# Altium PCB PCB1.PcbDoc
Units mm, origin at the board's own origin, x right, y up, seen from the top; angles counter-clockwise.
Board outline 244.98 x 101.98 mm, 2 copper layers (Top Layer, Bottom Layer), stack 2.391 mm thick; 16 components, 11 nets, 42 pads, 9 vias.
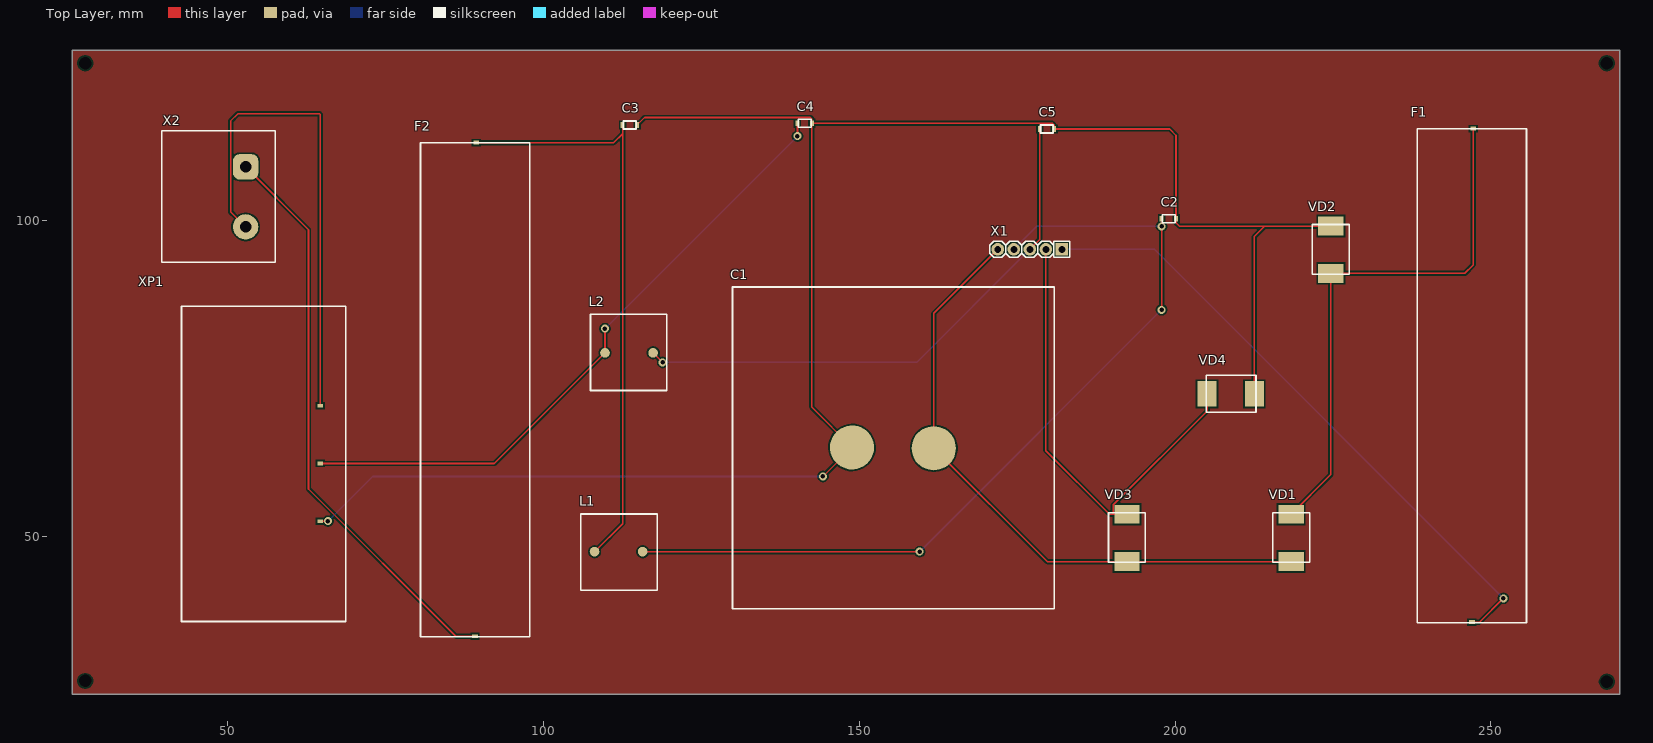
[diagram p0: Top Layer view]
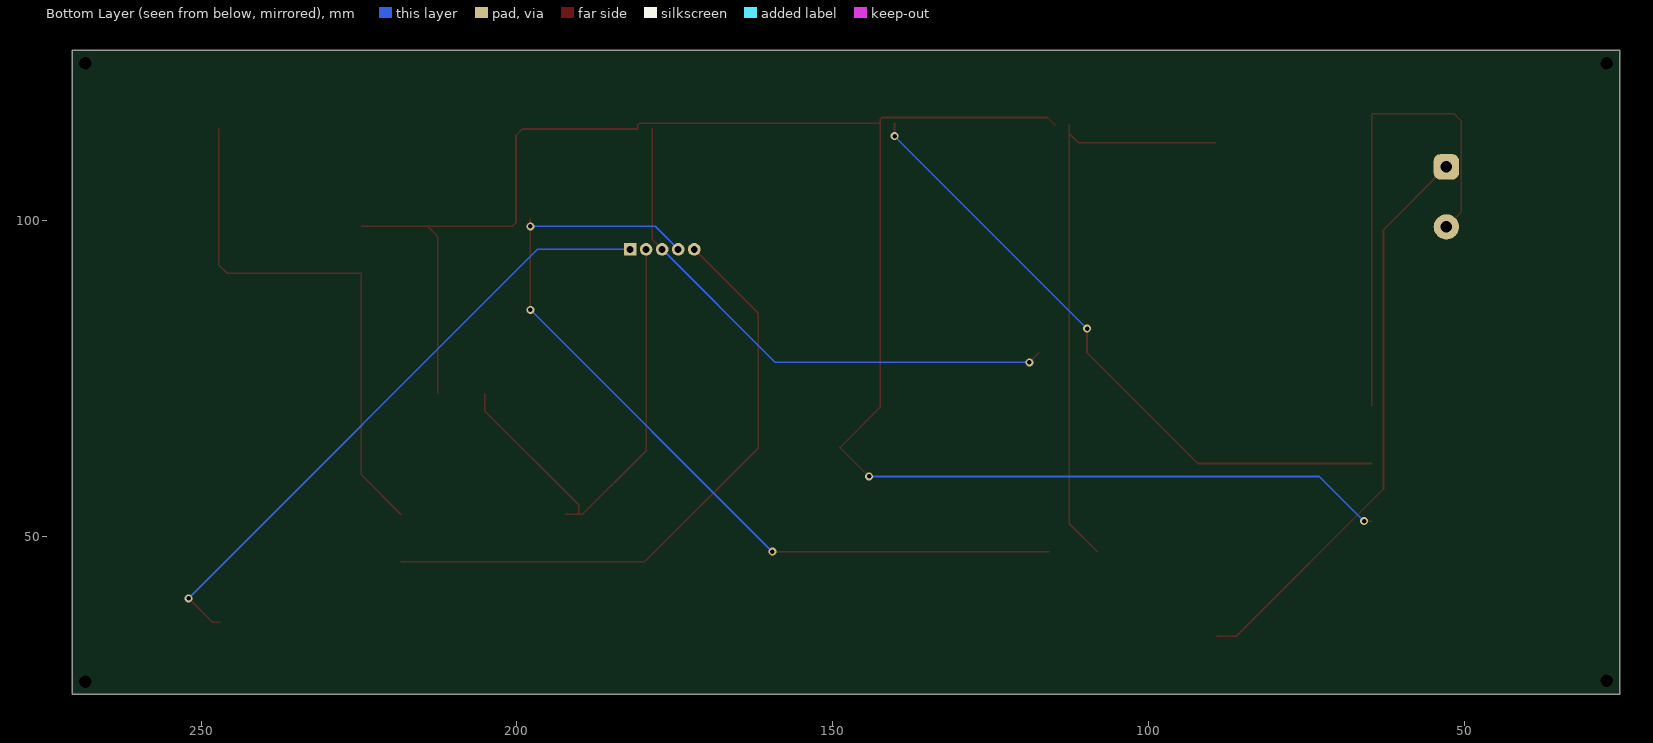
[diagram p1: Bottom Layer view, seen from below]
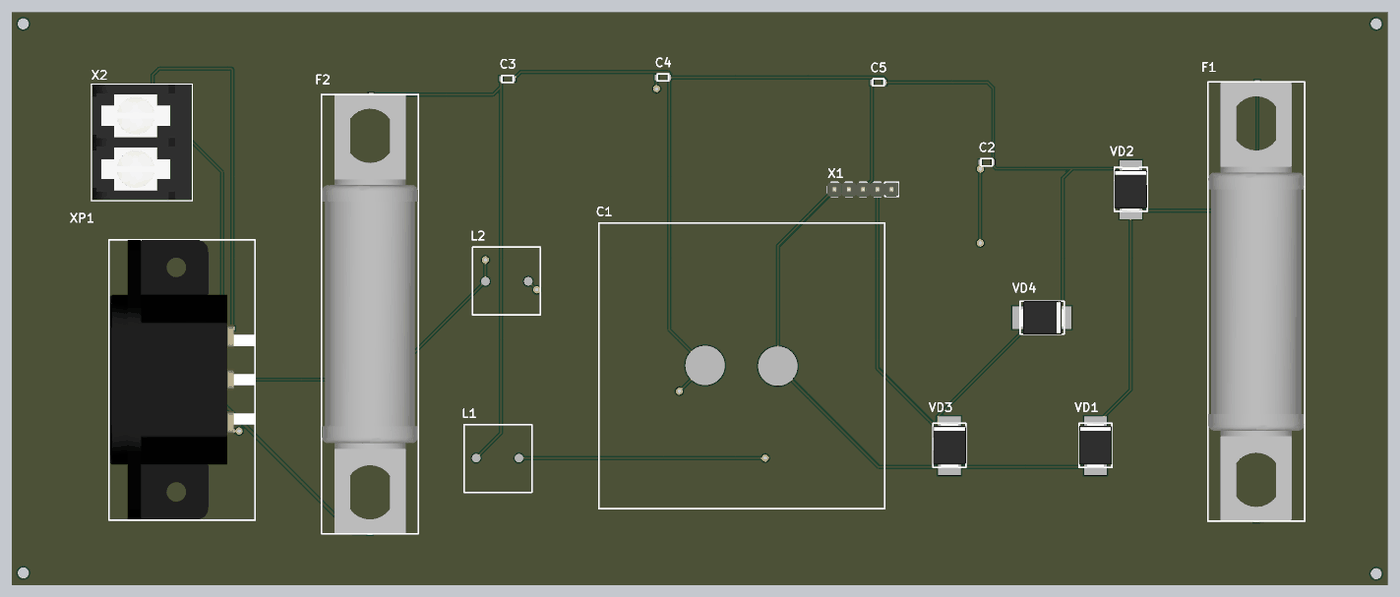
[diagram p2: 3D render of the assembled board from above, using the file's embedded part models]

## Layer stack, top to bottom
Top Solder: solder mask 0.0102, Solder Resist, Dk 3.5
Top Layer: signal copper 0.0356
Dielectric 1: dielectric 2.32, FR-4, Dk 4.8
Bottom Layer: signal copper 0.0356
Bottom Solder: solder mask 0.0102, Solder Resist, Dk 3.5

## Board outline
25.4,25.019 270.383,25.019 270.383,127 25.4,127

## Design rules (kind name [scope] priority, off if disabled: settings)
Clearance [All] p1: gap=0.254 ignorepadtopadclearanceinfootprint=FALSE
PolygonConnect [All] p1: connectstyle=Relief reliefconductorwidth=0.254 reliefentries=4 polygonreliefangle="90 Angle" airgapwidth=0.254
RoutingVias [All] p1: holewidth=0.711 width=1.27 viastyle="Through Hole" minholewidth=0.711 minwidth=1.27 maxholewidth=0.711 maxwidth=1.27
SolderMaskExpansion [All] p1: expansion=0.102 istentingtop=FALSE
SupplyNets "Schematic Supply Nets" [InNet('NetC1_1')] p1: voltage=0.000
Width [All] p1: maxlimit=0.254 minlimit=0.254 preferedwidth=0.254
30 further rules are at their usual default settings.

## Components (designator, comment, footprint, x,y, rotation, side; value= is the part's Value field where it differs from the comment)
C1 "22000 мкФ-63В-10%" condpolar 156.845,65.151 r0 top
C2 "0.1 мкФ-10%-25В-0805" Condensator 199.009,100.33 r180 top
C3 "0.1 мкФ-10%-25В-0805" Condensator 113.665,115.189 r180 top
C4 "0.1 мкФ-10%-25В-0805" Condensator 141.351,115.443 r0 top
C5 "0.1 мкФ-10%-25В-0805" Condensator 179.705,114.554 r180 top
F1 "80А-690В(80FE)" "FUSE 80" 247,75.5 r0 top
F2 "80А-690В(80FE)" "FUSE 80" 89.154,73.279 r0 top
L1 "10мГн-0.22A-10%" inductor 112.014,47.498 r180 top
L2 "10мГн-0.22A-10%" inductor 113.411,79.248 r0 top
VD1 "SMCJ150A-E3/57T" DIOD 218.5,50 r0 top
VD2 "SMCJ150A-E3/57T" DIOD 224.79,95.631 r0 top
VD3 "SMCJ150A-E3/57T" DIOD 192.5,50 r0 top
VD4 "SMCJ150A-E3/57T" DIOD 209,72.5 r270 top
X1 "Connector, 5pin, 2.54mm, 500VAC, 3A" "CON: PLS-5" 177,95.5 r180 top
X2 "Connector, 2pin, 9.53mm, 300VAC, 25A" "CON: 6PCV-02-006" 52.832,108.56 r270 top
XP1 "Connector, 3pin, 2.54mm, 250VAC, 3A" AC 51.816,59.182 r90 top

## Footprints (in the part's own frame and the unit in brackets; to place one, negate y for a bottom-side part, rotate by r counter-clockwise, add the part's x,y. Pads: shape width x height; smd on the part's side, far side on the other; paste and mask are expansions set on the pad)
AC [mm]
  rect 0.6x0.9 smd: 1(11.557,-12.827) 2(-6.731,-12.827) 3(2.413,-12.827)
  silkscreen extent -22.61,-16.89 27.3,9.14, body extent -22.49,-16.76 27.31,9.04, height 31.37
"CON: 6PCV-02-006" [mm]
  rrect50% 4x4 hole 1.8: 1(0,0)
  round 4 hole 1.8: 2(9.5,0)
  round 0.5 on Mech1: ""(-5,4)
  round 0.5 on Top Overlay: ""(-5,4)
  silkscreen extent -5.7,-13.3 15.1,4.7, body extent -5.6,-13.2 15,4.58, height 15.96
"CON: PLS-5" [mm]
  rect 2x2 hole 1.1: 1(-5.08,0)
  round 2 hole 1.1: 2(-2.54,0) 3(0,0) 4(2.54,0) 5(5.08,0)
  silkscreen extent -6.35,-1.27 6.35,1.27, body extent -6.35,-1.27 6.35,1.27, height 8.54
Condensator [mm]
  rect 0.6x0.9 smd: 1(-1.143,0) 2(1.143,0)
  silkscreen extent -1.02,-0.64 1.02,0.64, body extent -0.98,-0.65 1.02,0.65, height 1.27
condpolar [mm]
  round 7 smd: 1(-8.001,-1.016) 2(4.953,-1.143)
  silkscreen extent -26.92,-26.54 24,24.38, body extent -27.02,-26.59 23.98,24.31, height 102
DIOD [mm]
  rect 4x3 smd: 1(-0.127,3.556) 2(-0.127,-3.937)
  silkscreen extent -3.05,-4.06 2.79,3.81, body extent -3.08,-4.06 2.83,3.88, height 2.79
"FUSE 80" [mm]
  rect 0.9x0.6 smd: 1(0,-39.027) 2(0.2,39.127)
  silkscreen extent -8.64,-39.12 8.64,39.12, body extent -8.55,-39 8.55,39, height 19.11
inductor [mil]
  round 60 smd: 1(-145,-5) 2(155,-5)
  silkscreen extent -235,-240 240,235, body extent -231,-241 241,231, height 1003

## Part data
C1: library part конденсатор_поляр, Manufacturer=Тайвань, PartNumber=ECAP22000uF/63V,85°C, Href=https://www.chipdip.ru/product0/52234, Kind="Конденсатор полярный"
C2 C3 C4 C5: library part конденсатор, Manufacturer="Murata Electronics", PartNumber=GRM21BR71E104KA01L, Href=https://www.chipdip.ru/product/grm21br71e104ka01l, Kind=конденсатор
F1 F2: library part FUSE, Manufacturer=Eaton, PartNumber=80FE, Href=https://www.chipdip.ru/product0/8007032559, Kind=Дроссель
L1: library part inductor, Manufacturer="Kemet Electronics", PartNumber=SBC6-103-161, Href=https://www.chipdip.ru/product0/8008421775, Kind=Дроссель
L2: library part inductor, Manufacturer="Kemet Electronics", Href=https://www.chipdip.ru/product0/8008421775, Kind=Дроссель, PurtNumber=SBC6-103-161
VD1 VD2 VD3 VD4: library part Diod, Manufacturer="VISHAY INTERTECHNOLOGY INC.", Href=https://www.chipdip.ru/product0/8612399438
  VD1 VD4: Kind=Диод, PartNumber=SMCJ150A-E3/57T
  VD2: Kind=диод, PartNumber=SMCJ150A-E3/57T
  VD3: Kind=Диод, PurtNumber=SMCJ150A-E3/57T
X1: library part PLS-5, CurrentMax=3A, Manufacturer=Connfly, VoltageMax=500VAC, CommentText=DS1021-1x5, HelpURL=https://www.chipdip.ru/product/pls-5, Multichannel=5pin, PartNumber=PLS-5, Pitch=2.54mm, TypeConnector=Connector, ValueManufacturerPartNumber="Connector, 5pin, 2.54mm, 500VAC, 3A"
X2: library part Connector_6PCV-02, CurrentMax=25A, Manufacturer="TE Connectivity", PartNumber=6PCV-02-006, VoltageMax=300VAC, CommentText=6PCV-02-006, HelpURL=https://www.digikey.com/products/en?keywords=6PCV-02-006, Multichannel=2pin, Pitch=9.53mm, TypeConnector=Connector, ValueManufacturerPartNumber="Connector, 2pin, 9.53mm, 300VAC, 25A"
XP1: library part WF-3, CurrentMax=3A, Manufacturer=Connfly, VoltageMax=250VAC, CommentText=AS-205-UL-EN, HelpURL=https://www.chipdip.ru/product/wf-3, Multichannel=3pin, PartNumber=WF-3, Pitch=2.54mm, TypeConnector=Connector, ValueManufacturerPartNumber="Connector, 3pin, 2.54mm, 250VAC, 3A"

## Free pads (board coordinates)
  round 0 hole 2 unplated: 8(27.416,27.162) 8(27.416,124.984) 8(268.367,124.984) 8(268.375,27.025)

## Via types
v1: diameter 1.27, hole 0.711, Top Layer to Bottom Layer, 9 vias

## Nets (pads, with @x,y where several pads share a name; then routed paths per layer and width w, separated by ;. In a path a pad name is that pad's centre, name@x,y a point inside that pad or via, vN(x,y) a via of type N, cw(c..) or ccw(c..) an arc to the next point about the centre after c; other vN are vias at no path point)
NetC1_1: C1.1 C2.1 C3.1 C4.2 C5.1 VD2.1 VD4.1 XP1.2 | length 296.6
  Top Layer w0.254: XP1.2 v1(65.862,52.451) ; C3.1 116.002,116.383 142.24,116.383 142.494,116.129 C4.2 ; v1(144.247,59.538) C1.1 142.494,70.485 C4.2 ; VD4.1 212.556,97.536 214.207,99.187 ; VD2.1 214.207,99.187 ; C4.2 180.594,115.443 180.848,115.189 C5.1 199.136,114.554 200.152,113.538 C2.1 200.152,99.695 200.66,99.187 214.207,99.187
  Bottom Layer w0.254: v1(65.862,52.451) 72.949,59.538 v1(144.247,59.538)
NetC1_2: C1.2 VD1.2 VD3.2 X1.5 | length 99.7
  Top Layer w0.254: X1.5 161.798,85.378 C1.2 179.743,46.063 VD3.2 VD1.2
NetC2_2: C2.2 L1.1 X1.4 | length 137.3
  Top Layer w0.254: L1.1 v1(159.563,47.625) ; v1(197.866,85.928) v1(197.866,99.136) C2.2
  Bottom Layer w0.254: v1(159.563,47.625) v1(197.866,85.928) ; X1.4 178.096,99.136 v1(197.866,99.136)
NetC3_2: C3.2 F2.2 L1.2 | length 93.1
  Top Layer w0.254: F2.2 111.136,112.406 112.522,113.792 ; L1.2 112.522,52.07 112.522,113.792 ; C3.2 112.522,113.792
NetC4_1: C4.1 L2.1 XP1.3 | length 101.3
  Top Layer w0.254: XP1.3 92.202,61.595 L2.1 v1(109.728,82.931) ; v1(140.208,113.411) C4.1
  Bottom Layer w0.254: v1(109.728,82.931) v1(140.208,113.411)
NetC5_2: C5.2 L2.2 X1.3 | length 87.4
  Top Layer w0.254: L2.2 v1(118.872,77.597) ; X1.3 178.562,97.062 C5.2
  Bottom Layer w0.254: v1(118.872,77.597) 159.097,77.597 X1.3
NetF1_1: F1.1 X1.1 | length 99.3
  Top Layer w0.254: F1.1 248.207,36.473 v1(251.981,40.246)
  Bottom Layer w0.254: X1.1 196.727,95.5 v1(251.981,40.246)
NetF1_2: F1.2 VD1.1 VD2.2 | length 85.4
  Top Layer w0.254: VD1.1 224.663,59.846 VD2.2 245.872,91.694 247.2,93.022 F1.2
NetF2_1: F2.1 X2.1 | length 91.1
  Top Layer w0.254: X2.1 62.789,98.603 62.789,57.556 86.093,34.252 F2.1
NetVD3_1: VD3.1 VD4.2 X1.2 | length 74.1
  Top Layer w0.254: X1.2 179.54,63.627 189.611,53.556 190.22,53.556 ; VD3.1 190.22,53.556 ; VD4.2 205.063,69.884 190.22,55.042 190.22,53.556
NetX2_2: X2.2 XP1.1 | length 78.6
  Top Layer w0.254: X2.2 50.444,101.448 50.444,115.824 51.613,116.992 64.491,116.992 64.643,116.84 XP1.1
pads on no net: X2.

## Polygon pours and split planes (outlines as drawn)
no net on Top Layer "NONET_L01_P001" (solid, pour order 1): 25.4,25.019 25.4,127 270.383,127 270.383,25.019

## Text inside footprints (layer, text, board x,y; h text height)
X2: Mechanical 1 "2" at 49.232,99.36 h2 r270; Mechanical 1 "1" at 49.232,108.76 h2 r270